# Altium PCB BatuhanErbilBoostConverter.PcbDoc
Units mm, origin at the board's own origin, x right, y up, seen from the top; angles counter-clockwise.
Board outline 53.97 x 39.37 mm, 2 copper layers (Top Layer, Bottom Layer); 11 components, 7 nets, 30 pads, 6 vias.
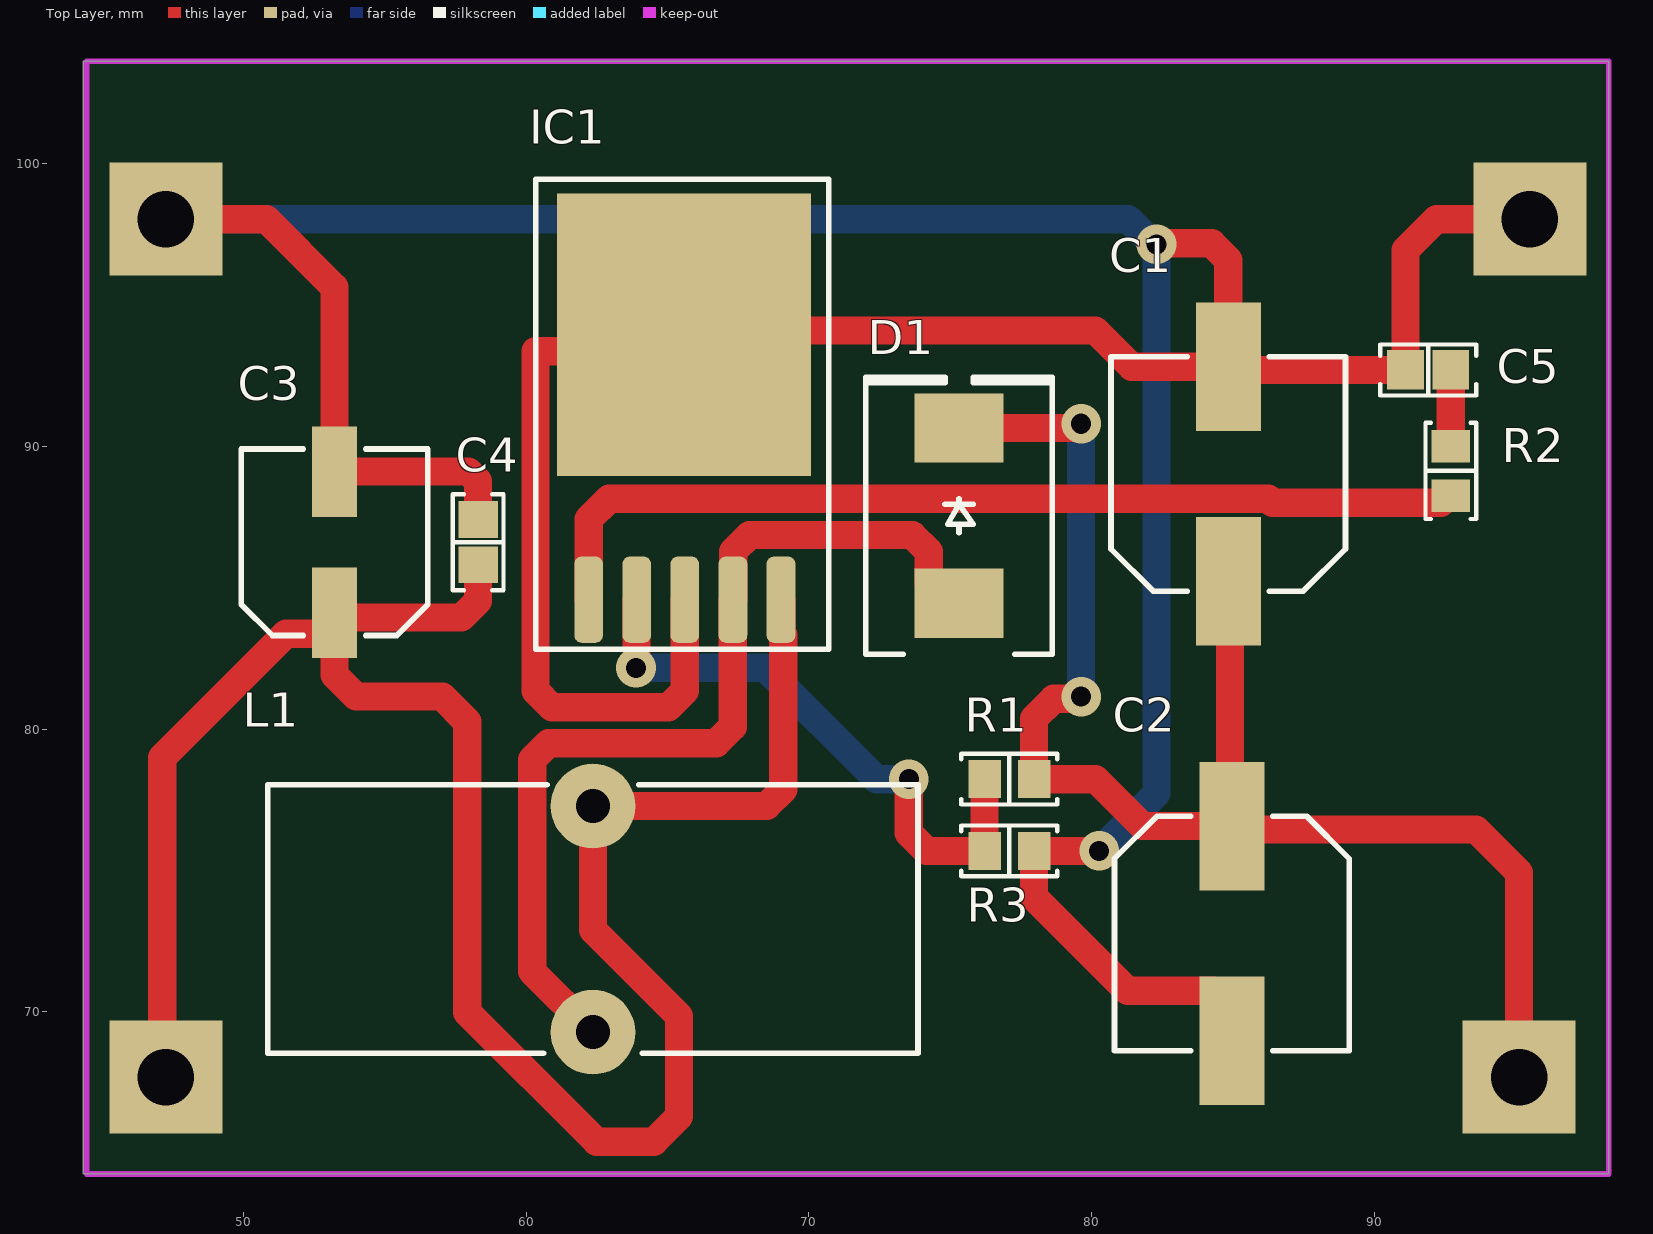
[diagram p0: Top Layer view]
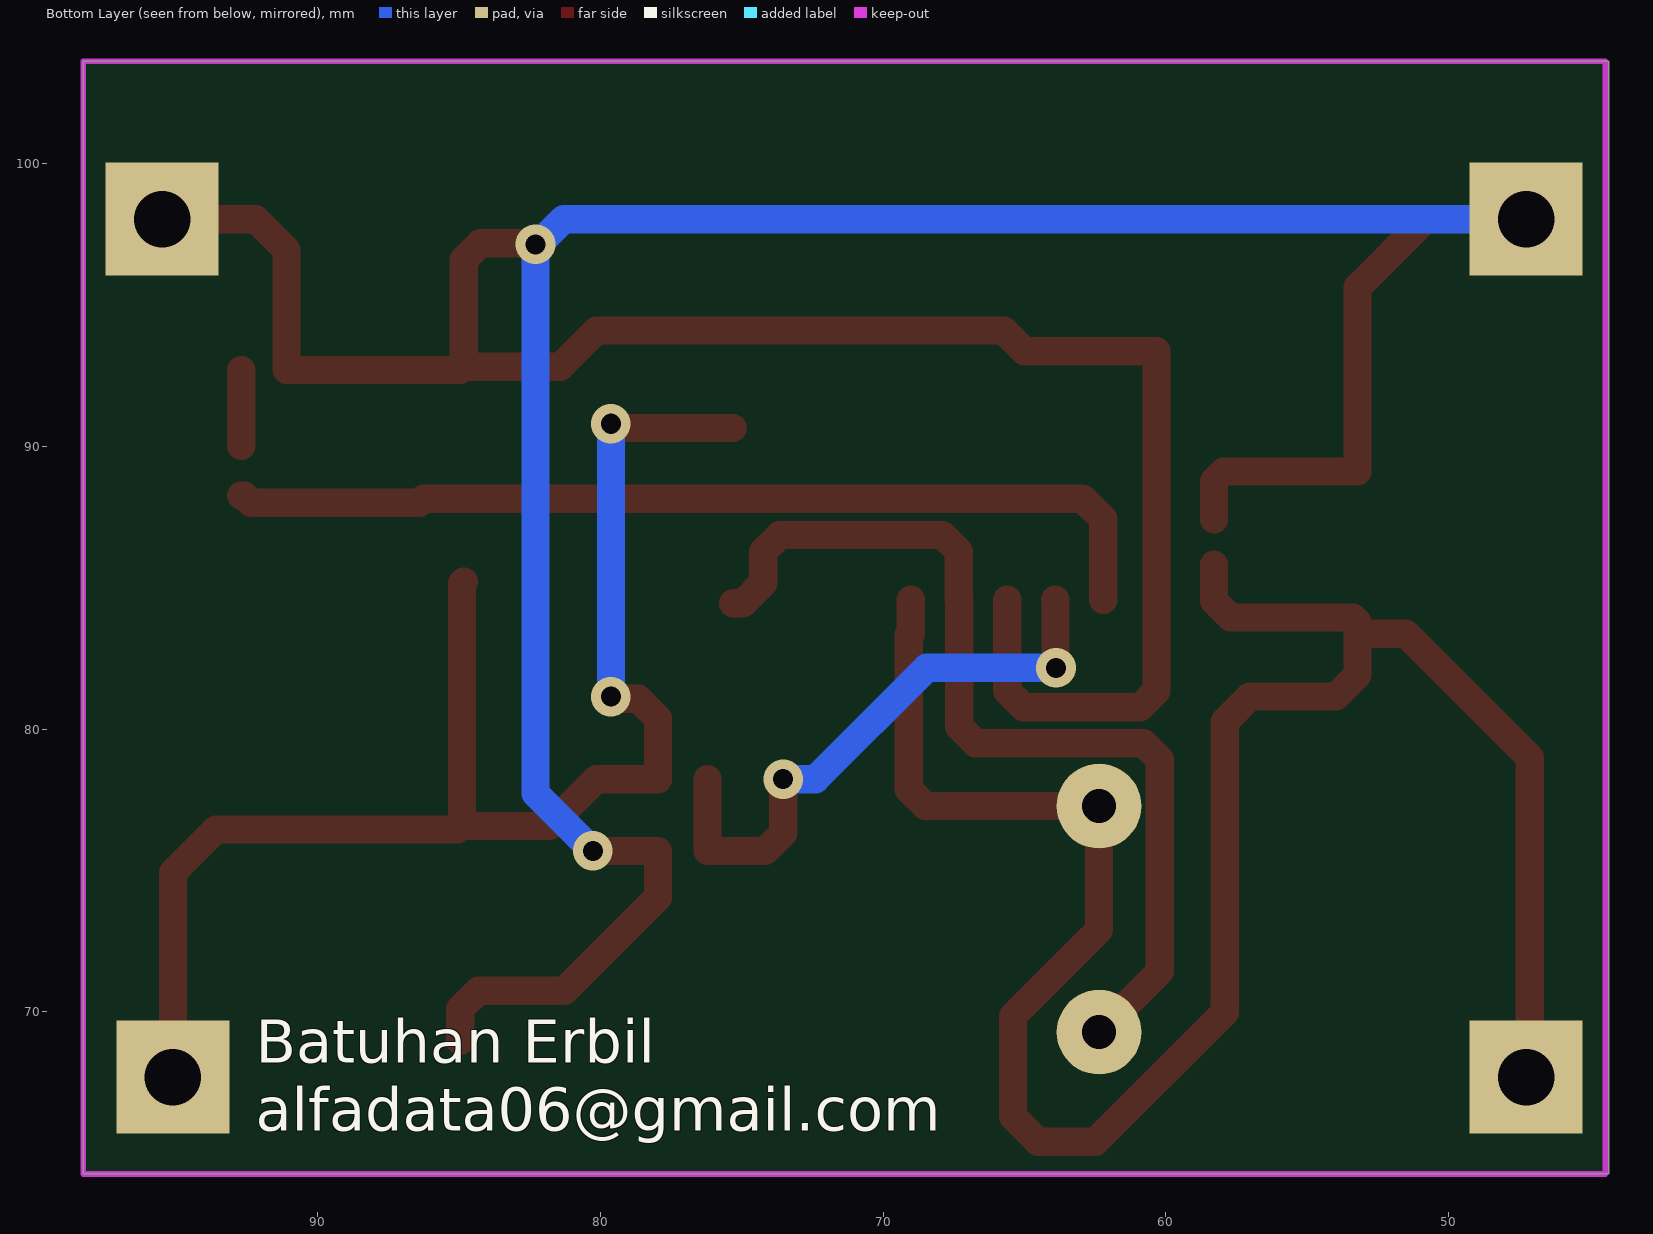
[diagram p1: Bottom Layer view, seen from below]
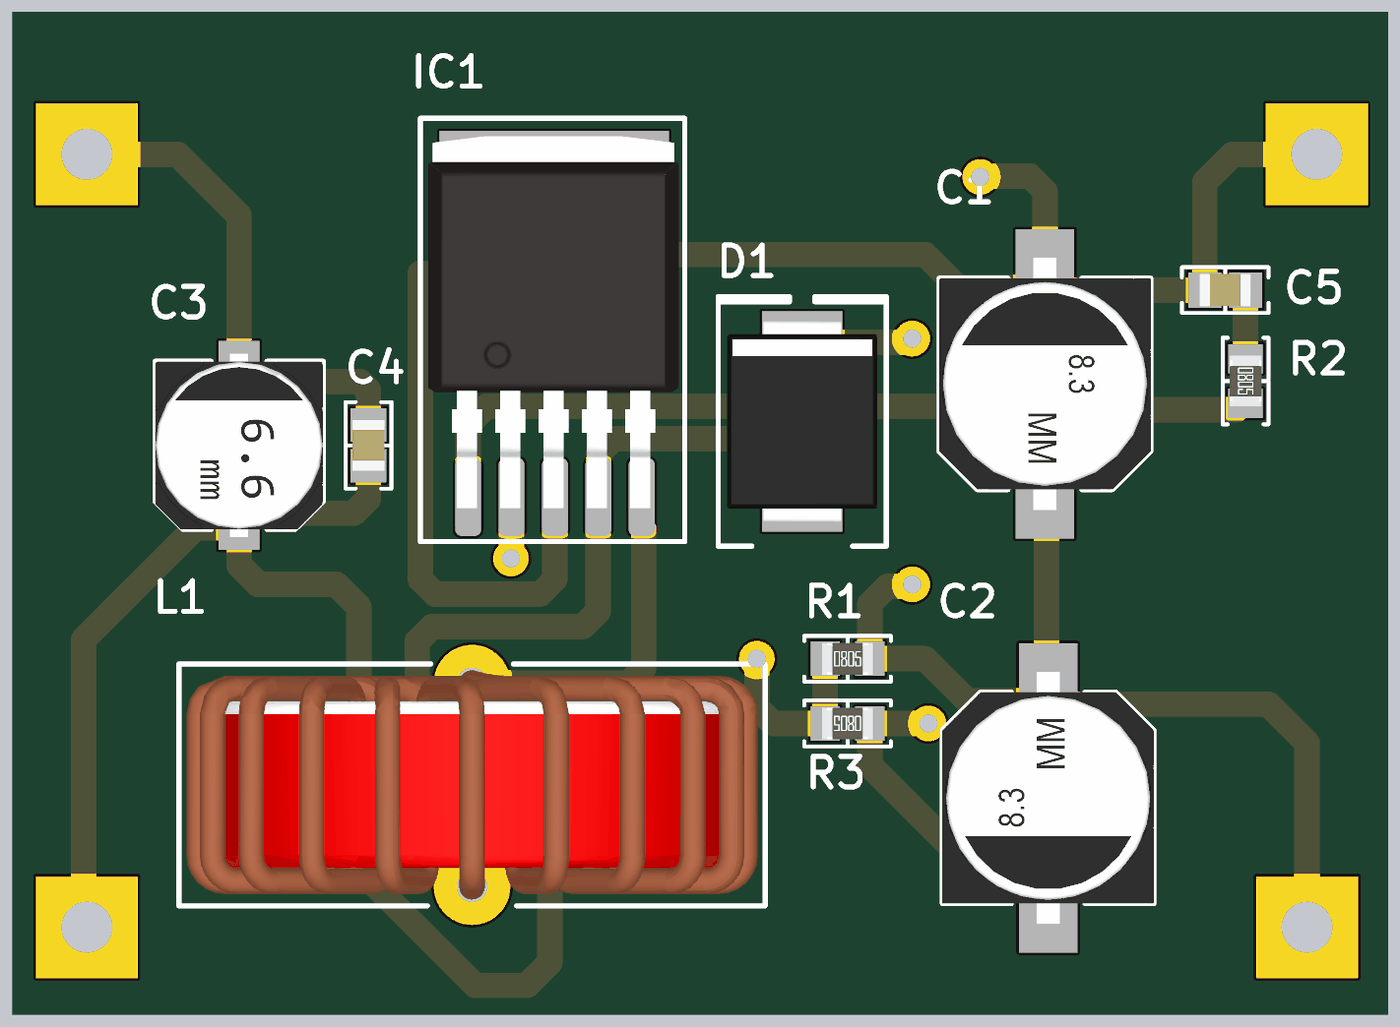
[diagram p2: 3D render of the assembled board from above, using the file's embedded part models]

## Layer stack, top to bottom
Top Solder: solder mask 0.0102, Solder Resist, Dk 3.5
Top Layer: signal copper 0.0356
Dielectric 1: dielectric 0.32, FR-4, Dk 4.8
Bottom Layer: signal copper 0.0356
Bottom Solder: solder mask 0.0102, Solder Resist, Dk 3.5

## Board outline
44.323,64.262 98.298,64.262 98.298,103.632 44.323,103.632

## Design rules (kind name [scope] priority, off if disabled: settings)
Clearance [All] p1: gap=0.152 ignorepadtopadclearanceinfootprint=FALSE
PolygonConnect [All] p1: connectstyle=Relief reliefconductorwidth=0.254 reliefentries=4 polygonreliefangle="90 Angle" airgapwidth=0.254
RoutingVias [All] p1: holewidth=0.5 width=0.8 viastyle="Through Hole" minholewidth=0.3 minwidth=0.5 maxholewidth=1 maxwidth=2
SolderMaskExpansion [All] p1: expansion=0.102 istentingtop=FALSE
Width [All] p1: maxlimit=3 minlimit=0.152 preferedwidth=0.5
30 further rules are at their usual default settings.

## Components (designator, comment, footprint, x,y, rotation, side; value= is the part's Value field where it differs from the comment)
C1 "100µF" "CAP ALSMD 8.3MM H10.5MM" 84.836,89.027 r90 top
C2 "100µF" "CAP ALSMD 8.3MM H10.5MM" 84.963,72.771 r270 top
C3 "56µF" "CAP ALSMD 6.6MM H7.7MM" 53.213,86.614 r90 top
C4 "0.1µF" "CAP 0805_2012" 58.293,86.614 r270 top
C5 "0.68µF" "CAP 0805_2012" 91.91,92.71 r0 top
D1 "SURS8360T3G" "DO214AB SMC" 75.311,87.555 r90 top
IC1 "LM2587" D2PAK 65.608,91.02 r0 top
L1 "100µH" 7447070 62.357,73.279 r0 top
R1 "56 kOhms" "RES 0805_2012" 77.089,78.232 r0 top
R2 "3 kOhms" "RES 0805_2012" 92.71,89.14 r270 top
R3 "2 kOhms" "RES 0805_2012" 77.089,75.692 r180 top

## Footprints (in the part's own frame and the unit in brackets; to place one, negate y for a bottom-side part, rotate by r counter-clockwise, add the part's x,y. Pads: shape width x height; smd on the part's side, far side on the other; paste and mask are expansions set on the pad)
7447070 [mm]
  round 3 hole 1.2: 1(0,4) 2(0,-4)
  silkscreen extent -11.5,-4.75 11.5,4.75, body extent -11.21,-4.5 11.21,4.5, height 22.31
"CAP 0805_2012" [mm] "Chip Capacitor, 2-Leads, Body 2.00x1.20mm, IPC Medium Density"
  rect 1.3x1.4 smd: 1(-0.8,0) 2(0.8,0)
  silkscreen extent -1.7,-0.9 1.7,0.9, body extent -1,-0.64 1,0.64, height 1.26
"CAP ALSMD 6.6MM H7.7MM" [mm] "Aluminum Electrolytic Capacitor, Body 6.60x6.60x7.70mm, IPC Low Density"
  rect 3.2x1.6 smd: 1(-2.5,0) 2(2.5,0)
  silkscreen extent -3.3,-3.3 3.3,3.3, body extent -3.6,-3.3 3.6,3.3, height 7.7
"CAP ALSMD 8.3MM H10.5MM" [mm] "Aluminum Electrolytic Capacitor, Body 8.30x8.30x10.50mm, IPC Low Density"
  rect 4.55x2.3 smd: 1(-3.8,0) 2(3.8,0)
  silkscreen extent -4.15,-4.15 4.15,4.15, body extent -4.95,-4.15 4.95,4.15, height 10.5
D2PAK [mm]
  rrect50% 1.016x3.05 smd: 1(-3.404,-6.438) 2(-1.702,-6.438) 3(0,-6.438) 4(1.702,-6.438) 5(3.404,-6.438)
  rect 9x10 smd: 3(-0.029,2.937)
  silkscreen extent -5.28,-8.19 5.1,8.44, body extent -4.97,-6.87 4.85,7.73, height 4.22
"DO214AB SMC" [mm] "Molded Diode, 2-Leads, Body 6.85x5.90mm, IPC Medium Density"
  rect 2.45x3.15 smd: 1(-3.1,0) 2(3.1,0)
  silkscreen extent -4.9,-3.3 4.9,3.3, body extent -3.97,-2.95 3.97,2.95, height 2.6
"RES 0805_2012" [mm] "Chip Resistor, 2-Leads, Body 2.00x1.25mm, IPC Medium Density"
  rect 1.15x1.35 smd: 1(-0.875,0) 2(0.875,0)
  silkscreen extent -1.7,-0.9 1.7,0.9, body extent -1,-0.62 1,0.63, height 0.6

## Part data
C1 C2: library part EEE-FK1H101P, "CAP ALUM 100UF 20% 50V SMD", Device Package="Radial, Can - SMD", Lifetime @ Temp.="2000 Hrs @ 105°C", Manufacturer="Panasonic Electronic Components", Operating Temperature="-55°C ~ 105°C", Ratings=AEC-Q200, Ripple Current @ High Frequency="350mA @ 100kHz", Ripple Current @ Low Frequency="262.5mA @ 120Hz", Supplier Part Number 1=PCE3809CT-ND, Tolerance=±20%, Voltage - Rated=50V, Applications=Automotive, Capacitance=100µF, ComponentLink2Description="DigiKey Link", ComponentLink2URL=http://digikey.com/product-detail/en/panasonic-electronic-components/EEE-FK1H101P/PCE3809CT-ND/766185, Height - Seated (Max)="0.413\" (10.50mm)", LastUpdated="2.09.2020 01:25:16", Lifecycle Status=Active, Minimum Order=1, Mounting Type="Surface Mount", Package / Case="Radial, Can - SMD", Packaging=TapeAndReel, Part Number=EEE-FK1H101P, Part Status=Active, PartId=7485, Polarization=Polar, Price=0.25, Series=FK, Size / Dimension="0.315\" Dia (8.00mm)", Supplier 1=DigiKey, Surface Mount Land Size="0.327\" L x 0.327\" W (8.30mm x 8.30mm)", Impedance="340 mOhms"
C3: library part UWD1V560MCL1GS, "CAP ALUM 56UF 20% 35V SMD", Device Package="Radial, Can - SMD", Lifetime @ Temp.="2000 Hrs @ 105°C", Manufacturer=Nichicon, Operating Temperature="-55°C ~ 105°C", Ripple Current @ High Frequency="280mA @ 100kHz", Ripple Current @ Low Frequency="140mA @ 120Hz", Supplier Part Number 1=493-9694-1-ND, Tolerance=±20%, Voltage - Rated=35V, Applications="General Purpose", Capacitance=56µF, ComponentLink1Description=Datasheet, ComponentLink1URL=http://nichicon-us.com/english/products/pdfs/e-uwd.pdf, ComponentLink2Description="DigiKey Link", ComponentLink2URL=http://digikey.com/product-detail/en/nichicon/UWD1V560MCL1GS/493-9694-1-ND/3963026, Height - Seated (Max)="0.303\" (7.70mm)", LastUpdated="2.09.2020 01:25:35", Lifecycle Status=Active, Minimum Order=1, Mounting Type="Surface Mount", Package / Case="Radial, Can - SMD", Packaging=TapeAndReel, Part Number=UWD1V560MCL1GS, Part Status=Active, PartId=8221, Price=0.27, Series=UWD, Size / Dimension="0.248\" Dia (6.30mm)", Supplier 1=DigiKey, Surface Mount Land Size="0.260\" L x 0.260\" W (6.60mm x 6.60mm)", Impedance="340 mOhms"
C4: library part CC0805JRX7R9BB104, "CAP CER 0.1UF 50V X7R 0805", Device Package="0805 (2012 Metric)", Manufacturer=Yageo, Operating Temperature="-55°C ~ 125°C", Supplier Part Number 1=311-1858-1-ND, Temperature Coefficient=X7R, Tolerance=±5%, Voltage - Rated=50V, Applications="General Purpose", Capacitance=0.1µF, ComponentLink1Description=Datasheet, ComponentLink1URL=https://www.yageo.com/upload/media/product/productsearch/datasheet/mlcc/UPY-GPHC_X7R_6.3V-to-50V_18.pdf, ComponentLink2Description="DigiKey Link", ComponentLink2URL=http://digikey.com/product-detail/en/yageo/CC0805JRX7R9BB104/311-1858-1-ND/5195760, LastUpdated="2.09.2020 01:04:41", Lifecycle Status=Active, Minimum Order=1, Mounting Type="Surface Mount, MLCC", Package / Case="0805 (2012 Metric)", Packaging=TapeAndReel, Part Number=CC0805JRX7R9BB104, Part Status=Active, PartId=2626, Price=0.03, Series=CC, Size / Dimension="0.079\" L x 0.049\" W (2.00mm x 1.25mm)", Supplier 1=DigiKey, Thickness (Max)="0.037\" (0.95mm)"
C5: library part C0805C684K5RACAUTO, "CAP CER 0.68UF 50V X7R 0805", Device Package="0805 (2012 Metric)", Manufacturer=KEMET, Operating Temperature="-55°C ~ 125°C", Ratings=AEC-Q200, Supplier Part Number 1=399-15904-1-ND, Temperature Coefficient=X7R, Tolerance=±10%, Voltage - Rated=50V, Applications="Automotive, Bypass, Decoupling", Capacitance=0.68µF, ComponentLink1Description=Datasheet, ComponentLink1URL=https://api.kemet.com/component-edge/download/datasheet/C0805C684K5RACAUTO.pdf, ComponentLink2Description="DigiKey Link", ComponentLink2URL=http://digikey.com/product-detail/en/kemet/C0805C684K5RACAUTO/399-15904-1-ND/7516404, LastUpdated="2.09.2020 01:04:17", Lifecycle Status=Active, Minimum Order=1, Mounting Type="Surface Mount, MLCC", Package / Case="0805 (2012 Metric)", Packaging=TapeAndReel, Part Number=C0805C684K5RACAUTO, Part Status=Active, PartId=15110, Price=0.08, Series="SMD Auto X7R", Size / Dimension="0.079\" L x 0.049\" W (2.00mm x 1.25mm)", Supplier 1=DigiKey, Thickness (Max)="0.057\" (1.45mm)"
D1: "DIODE GEN PURP 600V 3A SMC", Current - Average Rectified (Io)=3A, Current - Reverse Leakage @ Vr="10µA @ 600V", Manufacturer="ON Semiconductor", Operating Temperature - Junction="-65°C ~ 175°C", Package / Case="DO-214AB, SMC", Supplier Device Package=SMC, Supplier Part Number 1=SURS8360T3GOSCT-ND, Voltage - DC Reverse (Vr) (Max)=600V, Voltage - Forward (Vf) (Max) @ If="1.25V @ 3A", ComponentLink1Description=Datasheet, ComponentLink1URL=http://www.onsemi.com/pub/Collateral/MURS320T3-D.PDF, ComponentLink2Description="DigiKey Link", ComponentLink2URL=http://digikey.com/product-detail/en/on-semiconductor/SURS8360T3G/SURS8360T3GOSCT-ND/9087771, Diode Type=Standard, LastUpdated="2.09.2020 01:18:57", Lifecycle Status=Active, Minimum Order=1, Mounting Type="Surface Mount", Packaging=TapeAndReel, Part Number=SURS8360T3G, Part Status=Active, PartId=348, Price=0.30, Reverse Recovery Time (trr)=75ns, Series=-, Speed="Fast Recovery =< 500ns, > 200mA (Io)", Supplier 1=DigiKey
IC1: "Boost Converter"
L1: library part SRR1280-101M, "FIXED IND 100UH 2.1A 150MOHM SMD", Current - Saturation=2A, Current Rating (Amps)=2.1A, DC Resistance (DCR)="150mOhm Max", Device Package=Nonstandard, Frequency - Self Resonant=4.5MHz, Manufacturer="Bourns Inc.", Operating Temperature="-40°C ~ 125°C", Q @ Freq="18 @ 796kHz", Supplier Part Number 1=SRR1280-101MCT-ND, Tolerance=±20%, Inductance Frequency - Test=100kHz, ComponentLink1Description=Datasheet, ComponentLink1URL=https://www.bourns.com/docs/Product-Datasheets/SRR1280.pdf, ComponentLink2Description="DigiKey Link", ComponentLink2URL=http://digikey.com/product-detail/en/bourns-inc/SRR1280-101M/SRR1280-101MCT-ND/2127046, Height - Seated (Max)="0.315\" (8.00mm)", LastUpdated="2.09.2020 01:22:09", Lifecycle Status=Active, Material - Core=Ferrite, Minimum Order=1, Mounting Type="Surface Mount", Package / Case=Nonstandard, Packaging=TapeAndReel, Part Number=SRR1280-101M, Part Status=Active, PartId=24, Price=0.65, Series=SRR1280, Shielding=Shielded, Size / Dimension="0.492\" L x 0.492\" W (12.50mm x 12.50mm)", Supplier 1=DigiKey, Type=Wirewound, Inductance=100µH
R1: library part RMCF0805JT56K0, "RES 56K OHM 5% 1/8W 0805", Device Package="0805 (2012 Metric)", Manufacturer="Stackpole Electronics Inc", Operating Temperature="-55°C ~ 155°C", Power (Watts)="0.125W, 1/8W", Ratings=AEC-Q200, Supplier Device Package=0805, Supplier Part Number 1=RMCF0805JT56K0CT-ND, Temperature Coefficient=±200ppm/°C, Tolerance=±5%, ComponentLink1Description=Datasheet, ComponentLink1URL=https://www.seielect.com/catalog/sei-rmcf_rmcp.pdf, ComponentLink2Description="DigiKey Link", ComponentLink2URL=http://digikey.com/product-detail/en/stackpole-electronics-inc/RMCF0805JT56K0/RMCF0805JT56K0CT-ND/1942590, Composition="Thick Film", Features="Automotive AEC-Q200", Height - Seated (Max)="0.026\" (0.65mm)", LastUpdated="2.09.2020 01:14:46", Lifecycle Status=Active, Minimum Order=1, Number of Terminations=2, Package / Case="0805 (2012 Metric)", Packaging=CutTape, Part Number=RMCF0805JT56K0, Part Status=Active, PartId=44631, Price=0.10, Resistance="56 kOhms", Series=RMCF, Size / Dimension="0.079\" L x 0.049\" W (2.00mm x 1.25mm)", Supplier 1=DigiKey
R2: library part ERJ-6ENF3001V, "RES SMD 3K OHM 1% 1/8W 0805", Device Package="0805 (2012 Metric)", Manufacturer="Panasonic Electronic Components", Operating Temperature="-55°C ~ 155°C", Power (Watts)="0.125W, 1/8W", Ratings=AEC-Q200, Supplier Device Package=0805, Supplier Part Number 1=P3.0KCCT-ND, Temperature Coefficient=±100ppm/°C, Tolerance=±1%, ComponentLink1Description=Datasheet, ComponentLink1URL=https://industrial.panasonic.com/cdbs/www-data/pdf/RDA0000/AOA0000C304.pdf, ComponentLink2Description="DigiKey Link", ComponentLink2URL=http://digikey.com/product-detail/en/panasonic-electronic-components/ERJ-6ENF3001V/P3.0KCCT-ND/1746847, Composition="Thick Film", Features="Automotive AEC-Q200", Height - Seated (Max)="0.028\" (0.70mm)", LastUpdated="2.09.2020 01:15:19", Lifecycle Status=Active, Minimum Order=1, Number of Terminations=2, Package / Case="0805 (2012 Metric)", Packaging=TapeAndReel, Part Number=ERJ-6ENF3001V, Part Status=Active, PartId=30109, Price=0.01, Resistance="3 kOhms", Series=ERJ, Size / Dimension="0.079\" L x 0.049\" W (2.00mm x 1.25mm)", Supplier 1=DigiKey
R3: library part AC0805FR-072KL, "RES SMD 2K OHM 1% 1/8W 0805", Device Package="0805 (2012 Metric)", Manufacturer=Yageo, Operating Temperature="-55°C ~ 155°C", Power (Watts)="0.125W, 1/8W", Ratings=AEC-Q200, Supplier Device Package=0805, Supplier Part Number 1=YAG3718CT-ND, Temperature Coefficient=±100ppm/°C, Tolerance=±1%, ComponentLink1Description=Datasheet, ComponentLink1URL=https://www.yageo.com/upload/media/product/productsearch/datasheet/rchip/PYu-AC_51_RoHS_L_7.pdf, ComponentLink2Description="DigiKey Link", ComponentLink2URL=http://digikey.com/product-detail/en/yageo/AC0805FR-072KL/YAG3718CT-ND/6006567, Composition="Thick Film", Features="Automotive AEC-Q200, Moisture Resistant", Height - Seated (Max)="0.024\" (0.60mm)", LastUpdated="2.09.2020 01:15:09", Lifecycle Status=Active, Minimum Order=1, Number of Terminations=2, Package / Case="0805 (2012 Metric)", Packaging=TapeAndReel, Part Number=AC0805FR-072KL, Part Status=Active, PartId=34654, Price=0.01, Resistance="2 kOhms", Series=AC, Size / Dimension="0.079\" L x 0.049\" W (2.00mm x 1.25mm)", Supplier 1=DigiKey

## Free pads (board coordinates)
  rect 4x4 hole 2: GND(47.244,98.044) GND(95.504,98.044) VIN(47.244,67.691) VOUT(95.123,67.691)

## Via types
v1: diameter 1.4, hole 0.711, Top Layer to Bottom Layer, 6 vias

## Nets (pads, with @x,y where several pads share a name; then routed paths per layer and width w, separated by ;. In a path a pad name is that pad's centre, name@x,y a point inside that pad or via, vN(x,y) a via of type N, cw(c..) or ccw(c..) an arc to the next point about the centre after c; other vN are vias at no path point)
GND: C1.2 C2.2 C3.2 C4.1 C5.1 IC1.3 pad.GND R3.1 | length 159.8
  Top Layer w1: pad.GND@47.244,98.044 50.8,98.044 53.213,95.631 C3.2 57.952,89.114 58.293,88.773 C4.1 ; IC1.3@65.608,84.582 65.608,81.358 65.022,80.772 60.911,80.772 60.325,81.358 60.325,93.371 64.993,93.371 65.579,93.957 65.729,94.107 80.137,94.107 81.417,92.827 C1.2 ; v1(80.264,75.692) R3.1 77.964,74.055 81.273,70.746 84.313,70.746 84.963,70.096 C2.2 ; v1(82.296,97.155) 82.329,97.188 84.25,97.188 84.836,96.602 C1.2 ; pad.GND@95.504,98.044 92.202,98.044 91.11,96.952 C5.1 84.953,92.71 C1.2
  Bottom Layer w1: pad.GND@47.244,98.044 81.299,98.044 82.188,97.155 v1(82.296,97.155) 82.296,77.724 v1(80.264,75.692)
NetC5_2: C5.2 R2.1 | length 2.7
  Top Layer w1: R2.1 C5.2
NetD1_1: D1.1 IC1.4 L1.2 | length 34.2
  Top Layer w1: L1.2 60.205,71.431 60.205,78.916 60.791,79.502 66.716,79.502 67.302,80.088 67.302,84.574 67.318,84.59 67.318,86.282 67.904,86.868 73.65,86.868 74.236,86.282 74.236,85.18 74.961,84.455 D1.1
NetR1_1: IC1.2 R1.1 R3.2 | length 21.1
  Top Layer w1: v1(63.881,82.169) 63.898,82.186 63.898,84.574 IC1.2 ; v1(73.533,78.232) 73.533,76.327 74.168,75.692 R3.2 R1.1
  Bottom Layer w1: v1(63.881,82.169) 68.453,82.169 72.39,78.232 v1(73.533,78.232)
NetR2_2: IC1.1 R2.2 | length 33.8
  Top Layer w1: IC1.1 62.204,87.425 62.933,88.154 86.256,88.154 86.399,88.011 92.356,88.011 92.61,88.265 R2.2
VIN: C3.1 C4.2 IC1.5 L1.1 pad.VIN | length 78.9
  Top Layer w1: pad.VIN 47.117,67.818 47.117,78.994 51.499,83.376 C3.1@52.913,83.376 ; C4.2 58.293,84.533 57.707,83.947 53.38,83.947 53.213,83.78 53.213,81.915 53.975,81.153 57.023,81.153 57.912,80.264 57.912,69.977 62.484,65.405 64.516,65.405 65.405,66.294 65.405,69.85 62.357,72.898 L1.1 68.502,77.279 69.088,77.865 69.088,83.329 69.02,83.397 69.02,84.574 IC1.5
VOUT: C1.1 C2.1 D1.2 pad.VOUT R1.2 | length 52.6
  Top Layer w1: D1.2 79.371,90.655 79.521,90.805 v1(79.629,90.805) ; v1(79.629,81.153) 79.552,81.076 78.663,81.076 77.964,80.377 R1.2 80.137,78.232 81.798,76.571 C2.1 ; C1.1 84.9,85.163 84.9,76.635 C2.1 ; pad.VOUT 95.123,74.93 93.599,76.454 85.08,76.454 C2.1
  Bottom Layer w1: v1(79.629,81.153) v1(79.629,90.805)

## Keep-outs
Keep-Out Layer:
  lines w0.2: 44.45,64.262 44.45,103.632 98.298,103.632 98.298,64.262 44.45,64.262

## Silkscreen, mask and mechanical layers (free items; w line width, h text height)
Bottom Overlay:
  text "Batuhan Erbil" at 92.202,68.199 h1.52
  text "alfadata06@gmail.com" at 92.202,65.786 h1.52